# Altium PCB AMPURR.PcbDoc (part 5 of 6)
Units mm, origin at the board's own origin, x right, y up, seen from the top; angles counter-clockwise.
Board outline 100 x 100 mm, 4 copper layers (Top Layer, GND, VDD, Bottom Layer), stack 1.586 mm thick; 522 components, 281 nets, 1527 pads, 2431 vias.
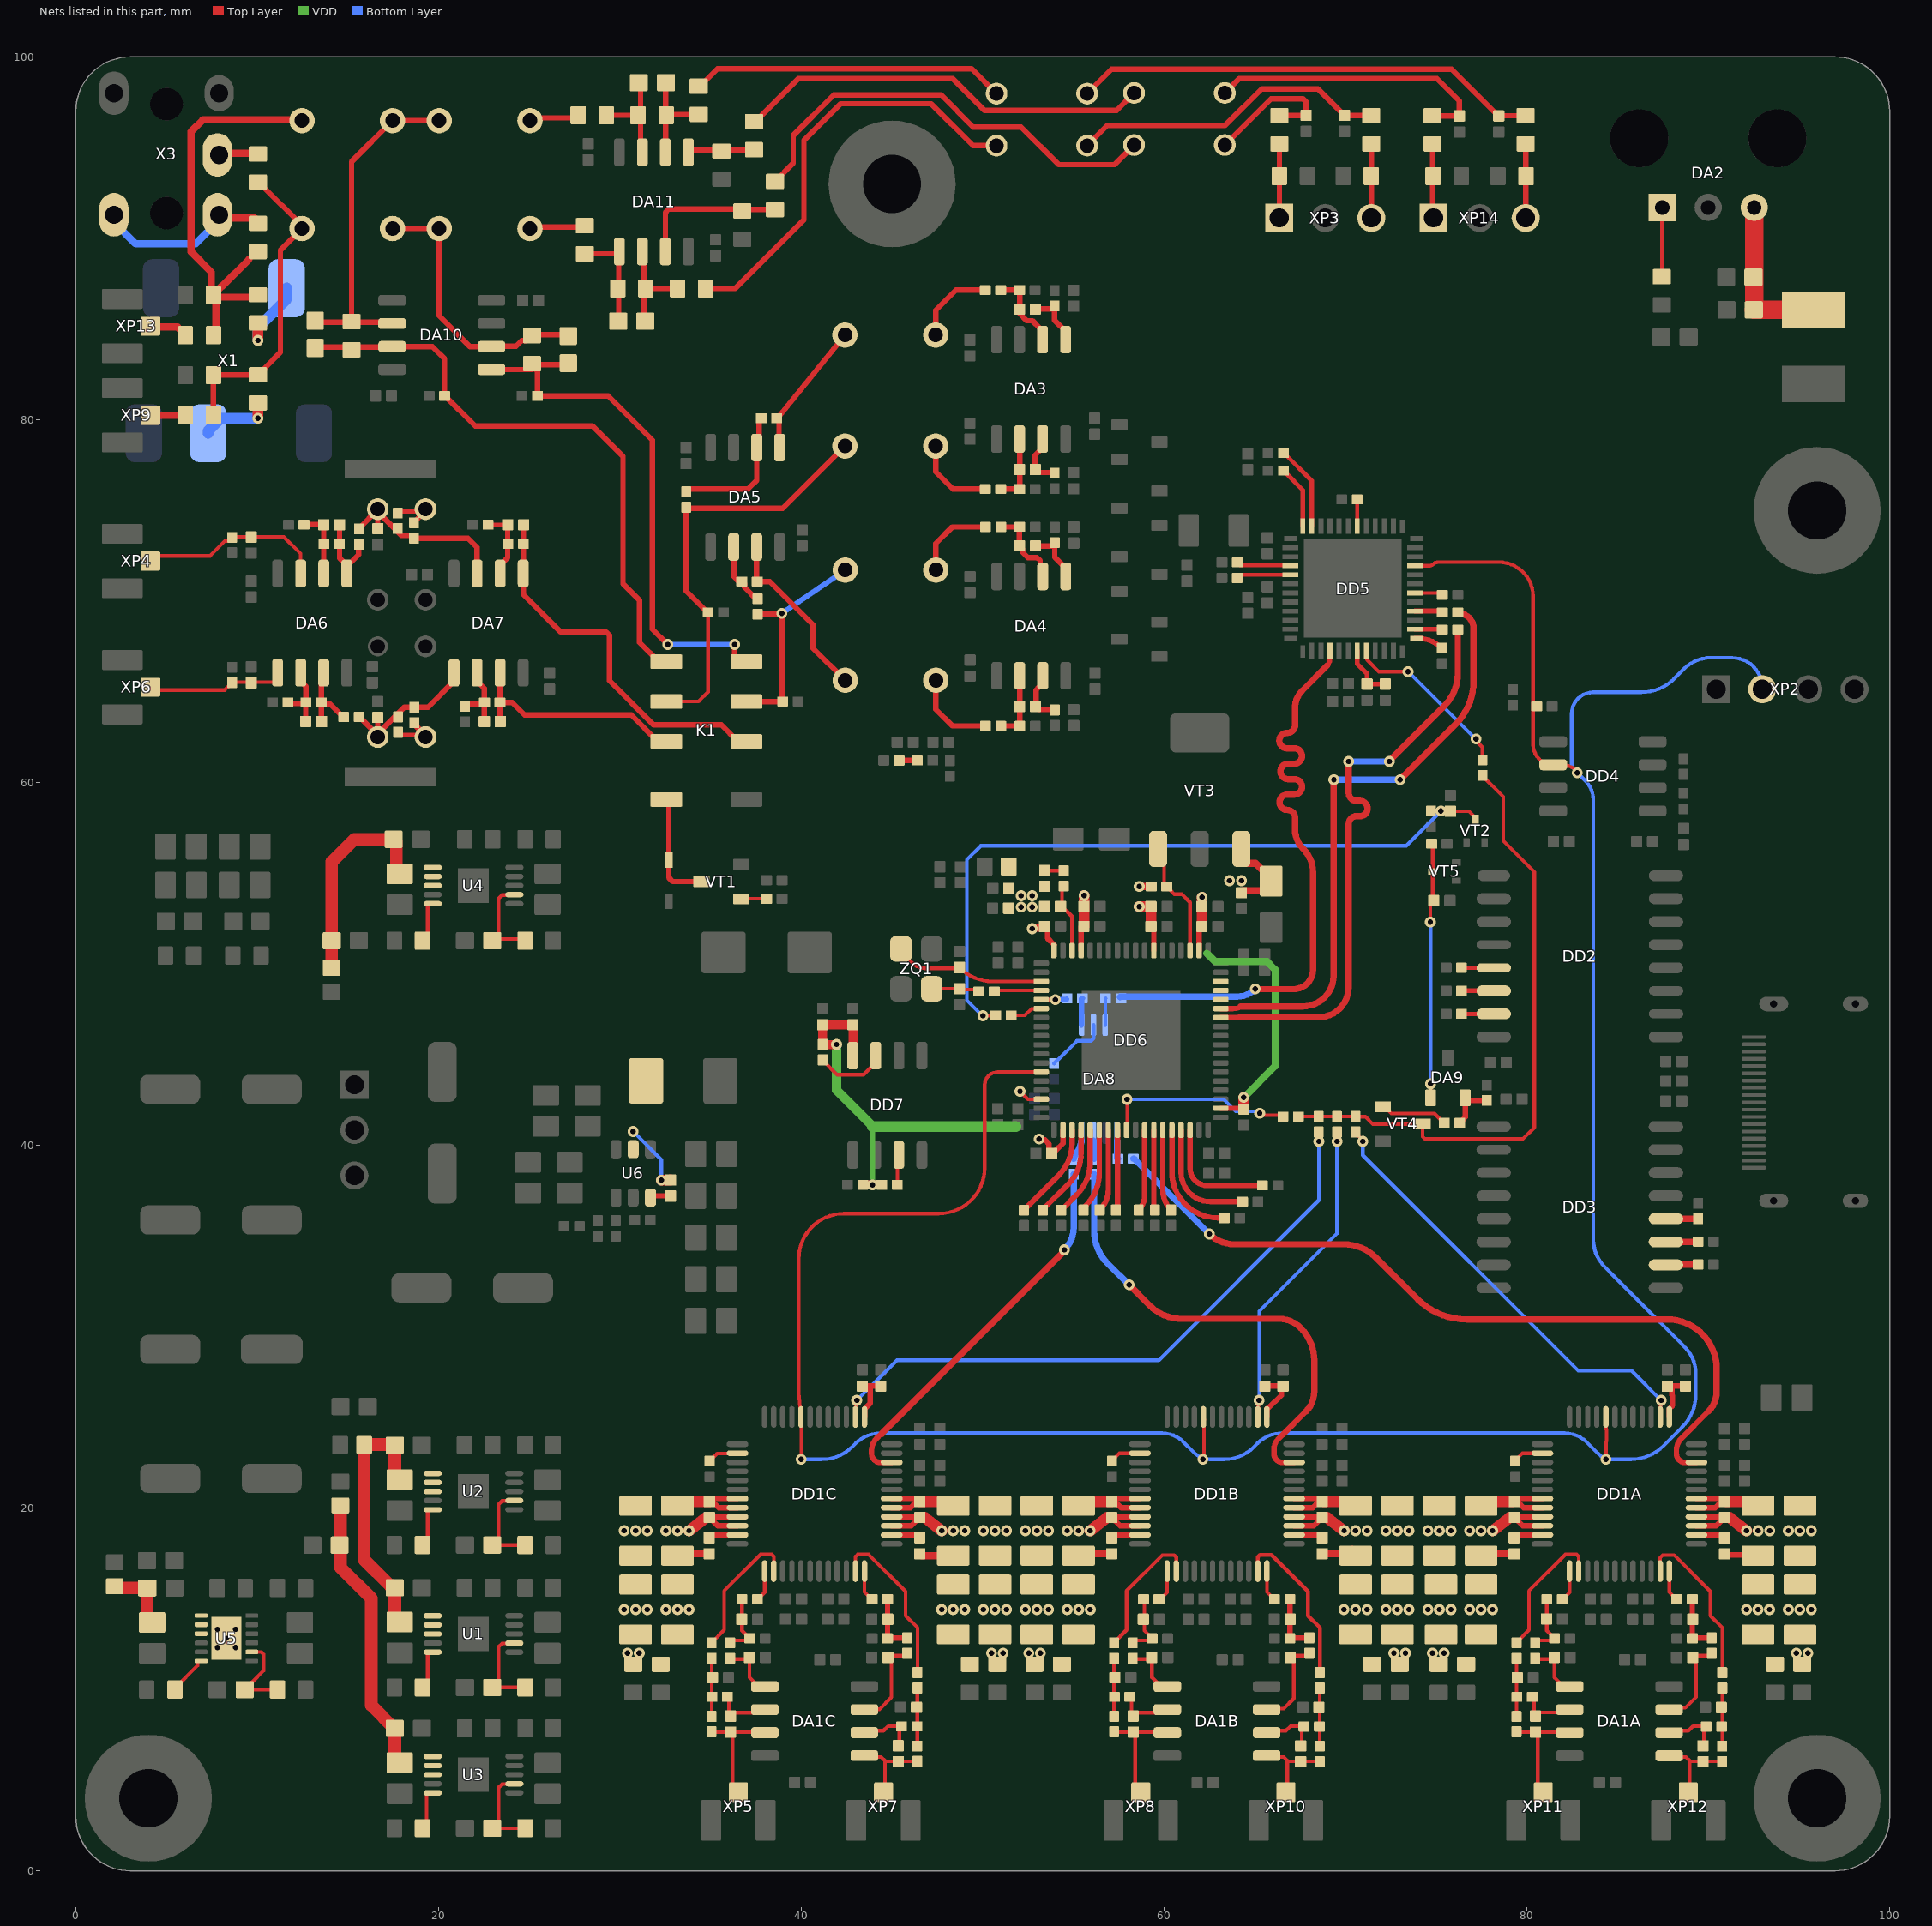
[diagram p6: the nets of this part, all layers, seen from the top]

## Via types
v1: diameter 0.6, hole 0.3, Top Layer to Bottom Layer, tented both sides, 2431 vias

## Nets (pads, with @x,y where several pads share a name; then routed paths per layer and width w, separated by ;. In a path a pad name is that pad's centre, name@x,y a point inside that pad or via, vN(x,y) a via of type N, cw(c..) or ccw(c..) an arc to the next point about the centre after c; other vN are vias at no path point) (continued)
IN2_LRCLK: DD6.66 R75.1 | length 32.5
  Top Layer w0.3: DD6.66@63.129,47.034 64.163,47.034
  Top Layer w0.35: 64.175,47.051 68.501,47.051 ccw(c68.501,48.731) 70.181,48.731 70.181,56.691 70.181,57.716 cw(c70.606,57.716) 70.606,58.141 70.796,58.141 ccw(c70.796,58.566) 71.221,58.566 ccw(c70.796,58.566) 70.796,58.991 70.606,58.991 cw(c70.606,59.416) 70.181,59.416 70.181,60.972 v1@70.181,60.974 ; v1@72.415,61.186 75.449,64.22 ccw(c73.653,66.016) 76.193,66.016 R75.1@76.193,68.434
  Bottom Layer w0.35: v1(70.18,61.16) v1(72.415,61.16)
IN2_SDATA: DD6.67 R74.1 | length 33.6
  Top Layer w0.281: DD6.67@62.985,47.535 63.917,47.535 ccw(c63.917,47.995) 64.224,47.652
  Top Layer w0.3: DD6.67@63.129,47.534 63.77,47.534
  Top Layer w0.35: 64.224,47.652 65.875,47.652 66.507,47.654 67.172,47.654 ; 67.172,47.651 67.641,47.651 ccw(c67.641,49.358) 69.348,49.358 69.348,60.143 v1(69.359,60.154) ; v1(73.015,60.152) 76.083,63.22 ccw(c73.727,65.576) 77.06,65.576 77.06,68.506 ccw(c76.24,68.506) R74.1@76.24,69.325
  Bottom Layer w0.35: v1(69.359,60.154) v1(69.359,60.154) 73.014,60.153 v1(73.015,60.152)
IN3_BCLK: DD6.68
IN3_LRCLK: DD6.69
IN3_SDATA: DD6.70
LEFT: C182.1 R145.2 R146.1 R150.2 R151.2 | length 17.3
  Top Layer w0.3: R145.2@7.586,80.264 R146.1@7.586,82.465 7.591,82.47 10.029,82.47 R151.2@10.034,82.474 10.109,82.474 10.384,82.749 10.384,82.824 11.279,83.72 11.279,89.357 C182.1@12.464,90.542 12.464,90.719 10.209,92.974 R150.2@10.034,92.974
LEFT_C: R139.2 R140.2 XP3.3 | length 4.1
  Top Layer w0.3: R140.2@71.424,95.209 71.426,95.207 71.426,91.129 XP3.3@71.427,91.128
LEFT_H: R136.2 R138.1 XP3.1 | length 4.1
  Top Layer w0.3: XP3.1@66.347,91.128 66.358,91.139 R136.2@66.358,95.209
LEFT_P: C158.2 DA6.3 R123.2 XP4.1 | length 10.5
  Top Layer w0.2: XP4.1@4.111,72.206 4.111,72.498 7.409,72.498 8.235,73.325 8.443,73.325 8.618,73.5 R123.2@8.618,73.517 ; R123.2@8.618,73.532 C158.2@9.668,73.532 11.469,73.532 12.383,72.618 12.383,71.539 DA6.3@12.397,71.526
MCLK: DA8.1 R104.1 | length 1.5
  Bottom Layer w0.3: DA8.1@55.456,46.632 55.456,48.064 R104.1@55.491,48.099
MVCC: C121.1 C124.1 C125.1 C126.2 C127.1 C130.1 C131.1 C132.1 C133.2 C134.1 C135.1 C136.1 C137.2 C148.1 C149.2 C150.2 C151.2 DD6.2 DD6.7 DD6.15 DD6.18 DD6.34 DD6.38 DD6.56 DD7.8 FB4.2 R84.1 R108.1 R109.2 R110.2 VT3.3 | length 56
  Top Layer w0.2: v1(52.053,42.974) 52.493,42.534 DD6.34@53.229,42.534
  Top Layer w0.3: v1(53.11,40.346) 53.168,40.288 53.434,40.288 53.65,40.073 53.65,39.716 C135.1@53.714,39.716 ; C134.1@53.57,51.905 53.57,51.418 DD6.18@53.929,51.06 ; C135.1@53.87,39.616 53.97,39.716 54.03,39.716 54.429,40.115 DD6.38@54.429,40.834 ; DD6.15@55.429,50.734 55.429,52.06 C133.2@55.484,52.115 ; v1@58.632,53.099 v1@58.637,53.104 ; C131.1@59.277,52.06 59.277,52.008 59.429,51.856 DD6.7@59.429,50.734 ; DD6.2@61.929,50.734 C124.1@61.929,52.009 ; DD6.56@63.129,42.034 C121.1@64.359,42.034
  Top Layer w0.4: v1(52.732,51.939) 52.77,51.977 53.322,51.977 C134.1@53.41,52.065 ; v1(58.632,54.262) 59.292,54.262 R84.1@59.292,54.265 ; VT3.3@64.252,55.539 65.054,55.539 65.906,54.687 65.906,54.446 65.481,54.021 64.355,54.021 C126.2@64.261,53.927
  Top Layer w0.5: v1@41.94,45.549 41.184,45.549 R109.2@41.176,45.557 C151.2@41.176,46.642 41.178,46.64 42.841,46.64 C150.2@42.843,46.638 42.843,45.353 42.833,45.343 DD7.8@42.833,44.943 ; R108.1@43.389,37.822 R110.2@44.439,37.822
  Top Layer w0.6: C133.2@55.585,52.065 C132.1@55.585,53.165 ; C132.1@55.593,53.173 v1(55.593,53.773) ; v1(58.632,53.162) 59.277,53.162 C131.1@59.277,52.06 ; C124.1@62.086,52.06 62.09,52.06 v1(62.09,53.682) ; v1(64.392,42.629) 64.392,42.072 C121.1@64.398,42.072
  VDD w0.3: v1(43.923,37.817) 43.923,41.054
  VDD w0.4: 62.35,50.582 62.804,50.128 65.675,50.128 66.129,49.674 66.129,44.367 v1(64.392,42.629)
  VDD w0.5: v1(41.94,45.557) 41.94,43.037 43.923,41.054
  VDD w0.6: 43.923,41.022 51.825,41.022
  other v1: 52.111,53.139 52.732,53.139 52.111,53.76 52.732,53.76 63.612,54.587 64.261,54.587
NetC3A_1: C3A.1 C4A.2 C5A.2 C6A.2 C7A.2 DD1A.41 DD1A.42 R1A.1 | length 6.4
  Top Layer w0.3: DD1A.41@89.356,20.019 90.388,20.019 C3A.1@90.725,20.356 ; DD1A.42@89.356,20.519 C3A.1@90.743,20.519 ; C3A.1@90.906,20.356 92.514,20.356 cw(c92.514,20.12) C4A.2@92.75,20.12
  Top Layer w0.62: C3A.1@90.988,20.36 C4A.2@92.51,20.36
  other v1: 94.857,11.993 95.497,11.993 94.416,14.4 95.051,14.4 95.686,14.4 94.416,18.745 95.051,18.745 95.686,18.745
NetC3A_2: C3A.2 C4A.1 C5A.1 C6A.1 C7A.1 C8A.1 DD1A.39 DD1A.40 R2A.1 | length 6.5
  Top Layer w0.3: DD1A.39@89.356,19.019 90.445,19.019 90.906,19.48 90.868,19.519 DD1A.40@89.356,19.519 ; C8A.1@90.906,17.476 91.066,17.413 92,17.413 C4A.1@92.75,17.37
  Top Layer w0.4: C3A.2@90.906,19.48 90.909,19.478 C3A.2@91.016,19.474
  Top Layer w0.62: C3A.2@91.175,19.473 v1@92.115,18.745
  other v1: 92.11,14.4 92.745,14.4 93.38,14.4 92.114,18.745 92.749,18.745 93.384,18.745
NetC3B_1: C3B.1 C4B.2 C5B.2 C6B.2 C7B.2 DD1B.41 DD1B.42 R1B.1 | length 6.8
  Top Layer w0.3: DD1B.41@67.168,20.019 68.2,20.019 C3B.1@68.537,20.356 ; DD1B.42@67.168,20.519 C3B.1@68.555,20.519
  Top Layer w0.5: C3B.1@68.718,20.356 C4B.2@70.326,20.356 ; C4B.2@70.326,20.356 cw(c70.326,20.12) C4B.2@70.562,20.12 ccw(c70.326,20.12) C4B.2@70.326,20.356
  Top Layer w0.62: C3B.1@68.8,20.36 69.609,20.36 C4B.2@70.322,20.36
  other v1: 72.669,11.993 73.309,11.993 72.228,14.4 72.863,14.4 73.498,14.4 72.228,18.745 72.863,18.745 73.498,18.745
NetC3B_2: C3B.2 C4B.1 C5B.1 C6B.1 C7B.1 C8B.1 DD1B.39 DD1B.40 R2B.1 | length 6.3
  Top Layer w0.3: DD1B.39@67.168,19.019 68.257,19.019 68.718,19.48 68.68,19.519 DD1B.40@67.168,19.519
  Top Layer w0.4: C8B.1@68.718,17.48 70.118,17.48 C4B.1@70.356,17.718 ; C3B.2@68.718,19.48 C3B.2@68.741,19.457 ; v1@69.926,18.8 v1@69.926,18.838
  Top Layer w0.62: C3B.2@68.987,19.473 v1(69.926,18.745)
  other v1: 69.922,14.4 70.557,14.4 71.192,14.4 70.561,18.745 71.196,18.745
NetC3C_1: C3C.1 C4C.2 C5C.2 C6C.2 C7C.2 DD1C.41 DD1C.42 R1C.1 | length 6.1
  Top Layer w0.3: DD1C.41@44.98,20.019 46.009,20.019 46.309,20.318 C3C.1@46.309,20.479 ; DD1C.42@44.98,20.519 C3C.1@46.309,20.519
  Top Layer w0.62: C3C.1@46.53,20.36 47.425,20.36 ; C3C.1@46.616,20.36 47.425,20.36 ; 47.425,20.36 C4C.2@48.138,20.36 ; C4C.2@48.138,20.36 cw(c48.138,20.12) C4C.2@48.378,20.12 ccw(c48.138,20.12) C4C.2@48.138,20.36
  other v1: 50.481,11.993 51.121,11.993 50.04,14.4 50.675,14.4 51.31,14.4 50.04,18.745 50.675,18.745 51.31,18.745
NetC3C_2: C3C.2 C4C.1 C5C.1 C6C.1 C7C.1 C8C.1 DD1C.39 DD1C.40 R2C.1 | length 8.1
  Top Layer w0.3: DD1C.39@44.98,19.019 46.069,19.019 C3C.2@46.53,19.48 46.492,19.519 DD1C.40@44.98,19.519
  Top Layer w0.4: C8C.1@46.53,17.48 46.635,17.375 C4C.1@48.378,17.375 ; C3C.2@46.53,19.48 46.634,19.376 47.087,19.376 v1@47.642,18.821 ; C4C.1@47.93,17.48 C4C.1@48.142,17.692
  Top Layer w0.62: C3C.2@46.803,19.473 v1@47.743,18.745
  other v1: 47.734,14.4 48.369,14.4 49.004,14.4 47.738,18.745 48.373,18.745 49.008,18.745
NetC8A_2: C8A.2 DD1A.38 | length 1.6
  Top Layer w0.3: DD1A.38@89.356,18.519 90.748,18.519 C8A.2@90.906,18.36
NetC8B_2: C8B.2 DD1B.38 | length 1.6
  Top Layer w0.3: DD1B.38@67.168,18.519 68.56,18.519 C8B.2@68.718,18.36
NetC8C_2: C8C.2 DD1C.38 | length 1.6
  Top Layer w0.3: DD1C.38@44.98,18.519 46.372,18.519 C8C.2@46.53,18.36
NetC11A_1: C11A.1 R3A.2 R4A.1 R5A.2 | length 3.2
  Top Layer w0.3: R5A.2@89.126,12.814 89.127,13.864 R3A.2@89.126,14.969 ; R5A.2@89.126,12.814 89.139,12.827 90.19,12.827 R4A.1@90.202,12.839
NetC11B_1: C11B.1 R3B.2 R4B.1 R5B.2 | length 3.2
  Top Layer w0.3: R5B.2@66.939,12.815 66.939,13.864 R3B.2@66.939,14.969 ; R5B.2@66.939,12.814 66.951,12.827 68.001,12.827 R4B.1@68.014,12.839
NetC11C_1: C11C.1 R3C.2 R4C.1 R5C.2 | length 3.2
  Top Layer w0.3: R3C.2@44.75,14.969 44.751,13.864 R5C.2@44.75,12.814 44.763,12.827 45.813,12.827 R4C.1@45.826,12.839
NetC12A_2: C12A.2 DA1A.3 R4A.2 | length 5.2
  Top Layer w0.2: DA1A.3@87.845,8.878 87.947,8.98 88.739,8.98 89.34,9.581 89.34,11.566 C12A.2@89.141,11.764 89.235,11.857 90.07,11.857 R4A.2@90.202,11.989
NetC12B_2: C12B.2 DA1B.3 R4B.2 | length 5.3
  Top Layer w0.2: DA1B.3@65.657,8.882 65.714,8.939 66.596,8.939 67.152,9.494 67.152,11.566 66.954,11.764 67.046,11.857 67.881,11.857 R4B.2@68.013,11.989
NetC12C_2: C12C.2 DA1C.3 R4C.2 | length 5.2
  Top Layer w0.2: DA1C.3@43.47,8.882 43.484,8.896 44.303,8.896 44.97,9.564 44.97,11.56 C12C.2@44.765,11.764 44.858,11.857 45.693,11.857 R4C.2@45.826,11.989
NetC13A_1: C13A.1 C14A.1 DD1A.1 | length 2.7
  Top Layer w0.3: C14A.1@87.745,26.721 88.006,26.721 C13A.1@88.746,26.721 ; DD1A.1@87.856,25.019 87.856,25.469 88.036,25.649 88.036,26.197 88.006,26.227 C14A.1@88.006,26.593
NetC13B_1: C13B.1 C14B.1 DD1B.1 | length 3.1
  Top Layer w0.3: C14B.1@65.557,26.721 C13B.1@66.558,26.721 66.46,26.623 66.46,26.213 65.715,25.469 65.668,25.469 DD1B.1@65.668,25.019
NetC13C_1: C13C.1 C14C.1 DD1C.1 | length 2.8
  Top Layer w0.3: C14C.1@43.369,26.721 C13C.1@44.37,26.721 ; DD1C.1@43.48,25.019 43.48,25.469 43.499,25.469 43.801,25.772 43.801,26.583 43.71,26.674
NetC15A_1: C15A.1 DA1A.2 R7A.1 | length 3.3
  Top Layer w0.2: DA1A.2@87.846,7.612 87.953,7.719 88.905,7.719 89.159,7.973 89.876,7.973 89.898,7.95 89.775,7.827 89.775,6.947 C15A.1@89.718,6.89
NetC15A_2: C15A.2 DA1A.1 R9A.2 XP12.1 | length 4.8
  Top Layer w0.2: DA1A.1@87.846,6.342 87.923,6.265 88.778,6.265 88.98,6.063 ; XP12.1@88.907,4.322 88.98,4.396 88.98,6.063 ; R9A.2@90.768,6.025 89.018,6.025 88.98,6.063
NetC15B_1: C15B.1 DA1B.2 R7B.1 | length 3.3
  Top Layer w0.2: DA1B.2@65.657,7.612 65.764,7.719 66.717,7.719 66.97,7.973 67.688,7.973 67.71,7.95 67.586,7.827 67.586,6.947 C15B.1@67.53,6.89
NetC15B_2: C15B.2 DA1B.1 R9B.2 XP10.1 | length 4.8
  Top Layer w0.2: DA1B.1@65.657,6.342 65.735,6.265 66.59,6.265 66.792,6.063 ; XP10.1@66.719,4.322 66.792,4.396 66.792,6.063 ; R9B.2@68.58,6.025 66.829,6.025 66.792,6.063
NetC15C_1: C15C.1 DA1C.2 R7C.1 | length 3.3
  Top Layer w0.2: DA1C.2@43.47,7.612 43.576,7.719 44.529,7.719 44.782,7.973 45.5,7.973 R7C.1@45.522,7.95 45.398,7.827 45.398,6.947 C15C.1@45.342,6.89
NetC15C_2: C15C.2 DA1C.1 R9C.2 XP7.1 | length 4.8
  Top Layer w0.2: DA1C.1@43.47,6.342 43.547,6.265 44.402,6.265 44.604,6.063 ; XP7.1@44.531,4.322 44.604,4.396 44.604,6.063 ; R9C.2@46.392,6.025 44.641,6.025 44.604,6.063
NetC16A_2: C16A.2 R6A.2 R7A.2 R9A.1 | length 3.2
  Top Layer w0.2: R9A.1@90.768,6.875 90.773,6.881 90.773,10.07 R6A.2@90.779,10.075
NetC16B_2: C16B.2 R6B.2 R7B.2 R9B.1 | length 3.2
  Top Layer w0.2: R9B.1@68.58,6.875 68.585,6.881 68.585,10.07 R6B.2@68.59,10.075
NetC16C_2: C16C.2 R6C.2 R7C.2 R9C.1 | length 3.2
  Top Layer w0.2: R9C.1@46.392,6.875 46.397,6.881 46.397,10.07 R6C.2@46.402,10.075
NetC21A_1: C21A.1 DA1A.6 R12A.2 | length 3.2
  Top Layer w0.2: R12A.2@80.3,9.585 80.389,9.497 80.389,8.617 C21A.1@80.48,8.525 ; C21A.1@80.48,8.525 80.683,8.728 82.215,8.728 DA1A.6@82.365,8.878
NetC21A_2: C21A.2 DA1A.7 R10A.2 XP11.1 | length 6.5
  Top Layer w0.2: R10A.2@79.43,7.66 79.455,7.636 80.481,7.636 80.597,7.636 82.342,7.636 DA1A.7@82.366,7.612 ; C21A.2@80.48,7.645 80.597,7.529 80.597,4.628 XP11.1@80.903,4.322
NetC21B_1: C21B.1 DA1B.6 R12B.2 | length 3.3
  Top Layer w0.2: R12B.2@58.112,9.585 58.201,9.497 58.201,8.617 C21B.1@58.292,8.525 58.48,8.713 60.308,8.713 DA1B.6@60.33,8.691
NetC21B_2: C21B.2 DA1B.7 R10B.2 XP8.1 | length 6.5
  Top Layer w0.2: R10B.2@57.242,7.66 57.267,7.636 58.293,7.636 58.409,7.636 60.154,7.636 DA1B.7@60.177,7.612 ; C21B.2@58.292,7.645 58.409,7.529 58.409,4.628 XP8.1@58.715,4.322
NetC21C_1: C21C.1 DA1C.6 R12C.2 | length 3.2
  Top Layer w0.2: R12C.2@35.925,9.585 36.013,9.497 36.013,8.617 C21C.1@36.105,8.525 36.292,8.712 37.443,8.712 37.613,8.882 DA1C.6@37.99,8.882
NetC21C_2: C21C.2 DA1C.7 R10C.2 XP5.1 | length 6.5
  Top Layer w0.2: R10C.2@35.055,7.66 35.078,7.636 36.105,7.636 36.221,7.636 37.966,7.636 DA1C.7@37.99,7.612 ; C21C.2@36.105,7.645 36.221,7.529 36.221,4.628 XP5.1@36.527,4.322
NetC22A_2: C22A.2 R10A.1 R11A.2 R12A.1 | length 3.2
  Top Layer w0.2: R10A.1@79.43,8.51 R11A.2@79.43,11.71
NetC22B_2: C22B.2 R10B.1 R11B.2 R12B.1 | length 3.2
  Top Layer w0.2: R10B.1@57.242,8.51 R11B.2@57.242,11.71
NetC22C_2: C22C.2 R10C.1 R11C.2 R12C.1 | length 3.2
  Top Layer w0.2: R10C.1@35.055,8.51 R11C.2@35.055,11.71
NetC23A_1: C23A.1 DD1A.23 | length 1.6
  Top Layer w0.3: C23A.1@79.302,18.36 79.461,18.519 DD1A.23@80.856,18.519
NetC23A_2: C23A.2 C26A.2 C27A.2 C28A.2 C29A.2 C30A.2 DD1A.21 DD1A.22 R18A.1 | length 7.6
  Top Layer w0.3: DD1A.22@80.856,19.019 79.767,19.019 79.306,19.48 79.345,19.519 DD1A.21@80.856,19.519
  Top Layer w0.4: C23A.2@79.302,17.476 79.192,17.479 78.173,17.479 77.729,17.48 C23A.2@79.302,17.48
  Top Layer w0.62: v1(78.108,18.745) C30A.2@79.048,19.473
  other v1: 76.838,14.4 77.473,14.4 78.108,14.4 76.838,18.745 77.473,18.745
NetC23B_1: C23B.1 DD1B.23 | length 1.6
  Top Layer w0.3: C23B.1@57.114,18.36 57.273,18.519 DD1B.23@58.668,18.519
NetC23B_2: C23B.2 C26B.2 C27B.2 C28B.2 C29B.2 C30B.2 DD1B.21 DD1B.22 R18B.1 | length 7.6
  Top Layer w0.3: DD1B.22@58.668,19.019 57.579,19.019 57.118,19.48 57.157,19.519 DD1B.21@58.668,19.519
  Top Layer w0.4: C28B.2@55.541,17.48 57.114,17.48 C28B.2@55.541,17.48
  Top Layer w0.62: v1@55.92,18.745 C30B.2@56.86,19.473
  other v1: 54.66,14.4 55.295,14.4 55.93,14.4 54.656,18.745 55.291,18.745 55.926,18.745
NetC23C_1: C23C.1 DD1C.23 | length 1.6
  Top Layer w0.3: C23C.1@34.926,18.36 35.085,18.519 DD1C.23@36.48,18.519
NetC23C_2: C23C.2 C26C.2 C27C.2 C28C.2 C29C.2 C30C.2 DD1C.21 DD1C.22 R18C.1 | length 5.9
  Top Layer w0.3: DD1C.22@36.48,19.019 35.391,19.019 C30C.2@34.93,19.48 34.969,19.519 DD1C.21@36.48,19.519
  Top Layer w0.4: C28C.2@33.518,17.48 C23C.2@34.926,17.48
  Top Layer w0.62: v1(33.803,18.745) C30C.2@34.743,19.473
  other v1: 32.533,14.4 33.168,14.4 33.803,14.4 32.533,18.745 33.168,18.745
NetC24A_1: C24A.1 R13A.2 R14A.1 R15A.2 | length 3.5
  Top Layer w0.2: R14A.1@80.452,12.56 80.452,12.576 80.577,12.701 81.378,12.701 81.512,12.835 81.101,13.246 81.101,13.885 R13A.2@81.101,14.969
NetC24B_1: C24B.1 R13B.2 R14B.1 R15B.2 | length 3.5
  Top Layer w0.2: R14B.1@58.264,12.56 58.264,12.576 58.389,12.701 59.19,12.701 59.324,12.835 58.913,13.246 58.913,13.885 R13B.2@58.913,14.969
NetC24C_1: C24C.1 R13C.2 R14C.1 R15C.2 | length 3.5
  Top Layer w0.2: R14C.1@36.076,12.56 36.076,12.576 36.201,12.701 37.002,12.701 37.136,12.835 36.725,13.246 36.725,13.885 R13C.2@36.725,14.969
NetC25A_2: C25A.2 DA1A.5 R14A.2 | length 3.1
  Top Layer w0.2: R14A.2@80.452,11.71 80.496,11.666 81.468,11.666 81.512,11.622 81.512,10.656 82.016,10.152 DA1A.5@82.366,10.152
NetC25B_2: C25B.2 DA1B.5 R14B.2 | length 3.1
  Top Layer w0.2: R14B.2@58.264,11.71 58.308,11.666 59.28,11.666 59.324,11.622 59.324,10.656 59.828,10.152 DA1B.5@60.177,10.152
NetC25C_2: C25C.2 DA1C.5 R14C.2 | length 3.1
  Top Layer w0.2: R14C.2@36.076,11.71 36.12,11.666 37.092,11.666 37.136,11.622 37.136,10.656 37.64,10.152 DA1C.5@37.99,10.152
NetC26A_1: C26A.1 C27A.1 C28A.1 C29A.1 C30A.1 DD1A.19 DD1A.20 R17A.1 | length 7.6
  Top Layer w0.3: C30A.1@79.469,20.519 DD1A.19@80.856,20.519 ; C30A.1@79.487,20.356 79.824,20.019 DD1A.20@80.856,20.019
  Top Layer w0.4: C28A.1@77.66,20.465 79.201,20.465 C30A.1@79.306,20.36
  Top Layer w0.62: C28A.1@77.473,20.12 cw(c77.713,20.12) C28A.1@77.713,20.36 ; C30A.1@79.235,20.36 78.83,20.36 ; C28A.1@77.713,20.36 78.83,20.36 ; C28A.1@77.713,20.36 78.426,20.36 78.83,20.36
  other v1: 74.796,11.993 75.436,11.993 74.545,14.4 75.18,14.4 75.815,14.4 74.545,18.745 75.18,18.745 75.815,18.745
NetC26B_1: C26B.1 C27B.1 C28B.1 C29B.1 C30B.1 DD1B.19 DD1B.20 R17B.1 | length 5.1
  Top Layer w0.3: C30B.1@57.118,20.356 57.281,20.519 DD1B.19@58.668,20.519 ; C30B.1@57.299,20.356 57.636,20.019 DD1B.20@58.668,20.019
  Top Layer w0.62: C28B.1@55.285,20.12 cw(c55.521,20.12) C28B.1@55.521,20.356 ; C28B.1@55.525,20.36 56.238,20.36 ; 56.238,20.356 C30B.1@57.118,20.356
  other v1: 52.543,11.993 53.183,11.993 52.354,14.4 52.989,14.4 53.624,14.4 52.354,18.745 52.989,18.745 53.624,18.745
NetC26C_1: C26C.1 C27C.1 C28C.1 C29C.1 C30C.1 DD1C.19 DD1C.20 R17C.1 | length 5.8
  Top Layer w0.3: C30C.1@35.089,20.519 DD1C.19@36.48,20.519 ; C30C.1@35.151,20.318 35.45,20.019 DD1C.20@36.48,20.019
  Top Layer w0.62: C30C.1@34.93,20.36 34.121,20.36 ; C28C.1@33.408,20.36 ccw(c33.408,20.12) C28C.1@33.168,20.12 C28C.1@33.408,20.36 ; C28C.1@33.408,20.36 34.121,20.36 ; C28C.1@33.408,20.36 34.121,20.36
  other v1: 30.42,11.993 31.06,11.993 30.226,14.4 30.861,14.4 31.496,14.4 30.226,18.745 30.861,18.745 31.496,18.745
NetC33_1: C33.1 C34.1 DA2.3 L1.1 | length 9
  Top Layer w1: C34.1@92.514,86.062 C34.1@92.54,86.062 ; DA2.3@92.54,91.706 C34.1@92.54,86.062 ; L1.1@95.812,86.028 95.777,86.062 C34.1@92.54,86.062
NetC37_1: C37.1 R25.1 R107.2 VT2.3 | length 39.7
  Top Layer w0.2: v1(50.005,47.142) 50.707,47.142 R107.2@50.723,47.158 ; R25.1@74.724,58.425 v1@75.276,58.425 ; v1(75.267,58.429) 75.275,58.421 75.792,58.421 C37.1@75.793,58.42 ; C37.1@75.788,58.412 76.812,58.412 77.17,58.054 VT2.3@77.17,57.979
  Bottom Layer w0.2: v1(50.005,47.142) 49.973,47.142 49.126,47.989 49.126,55.743 49.898,56.515 73.354,56.515 v1(75.267,58.429)
NetC42_2: C42.2 DA9.1 R129.1 VT5.3 | length 14.2
  Top Layer w0.2: v1(74.682,52.304) 74.682,53.295 C42.2@74.873,53.486 ; v1(74.697,43.385) DA9.1@74.697,42.612 DA9.1@74.761,42.547 ; R129.1@74.753,56.625 74.813,56.564 74.813,55.088 74.813,53.547 C42.2@74.846,53.514
  Bottom Layer w0.2: v1(74.682,52.304) 74.69,52.296 74.69,43.392 v1(74.697,43.385)
NetC45_2: C45.2 C46.1 C48.2 C50.1 FB1.2 U1.1 U1.2 U1.3 U2.1 U2.2 U2.3 | length 14.8
  Top Layer w0.3: C46.1@17.809,13.702 C46.1@18.159,13.352 ; C46.1@18.161,13.546 C46.1@18.161,13.565 ; C46.1@18.311,13.85 C46.1@18.313,13.852
  Top Layer w0.7: FB1.2@15.899,23.477 15.899,18.18 15.899,17.141 17.313,15.727 17.459,15.727 C48.2@17.584,15.602 17.584,13.927 C46.1@17.809,13.702 ; FB1.2@15.959,23.497 C45.2@17.545,23.497 ; C45.2@17.589,23.458 17.589,21.783 17.814,21.558 C50.1@17.86,21.558
NetC51_1: C51.1 R37.2 U1.7 | length 5.1
  Top Layer w0.2: C51.1@22.955,10.102 R37.2@24.763,10.102 ; C51.1@23.014,10.102 23.296,10.384 23.296,12.335 23.494,12.533 24.155,12.533 U1.7@24.174,12.552
NetC52_1: C52.1 R39.2 U2.7 | length 5.1
  Top Layer w0.2: C52.1@22.955,17.958 R39.2@24.763,17.958 ; C52.1@23.014,17.958 23.296,18.24 23.296,20.191 23.494,20.389 24.155,20.389 U2.7@24.174,20.408
NetC53_2: C53.2 C54.1 C193.2 FB5.2 U4.1 U4.2 U4.3 | length 11.8
  Top Layer w0.7: FB5.2@14.105,49.781 14.105,55.621 15.351,56.867 C53.2@17.519,56.867 17.545,56.867 17.669,56.742 17.669,55.088 C54.1@17.79,54.967
NetC58_1: C58.1 C61.2 C192.2 FB2.2 U3.1 U3.2 U3.3 | length 15.6
  Top Layer w0.7: FB2.2@14.584,20.134 14.584,16.726 16.295,15.015 16.295,9.111 17.561,7.845 C61.2@17.586,7.845 17.586,6.17 17.811,5.945 C58.1@17.857,5.945
NetC62_1: C62.1 R45.2 U3.7 | length 5.1
  Top Layer w0.2: C62.1@22.957,2.345 R45.2@24.765,2.345 ; C62.1@23.016,2.345 23.298,2.627 23.298,4.578 23.496,4.776 24.157,4.776 U3.7@24.176,4.795
NetC63_1: C63.1 R47.2 U4.7 | length 5.1
  Top Layer w0.2: C63.1@22.957,51.368 R47.2@24.765,51.368 ; C63.1@23.015,51.368 23.297,51.65 23.297,53.601 23.495,53.799 24.157,53.799 U4.7@24.176,53.818
NetC64_2: C64.2 R49.1 U5.8 | length 4.8
  Top Layer w0.2: C64.2@9.308,9.987 C64.2@9.333,9.987 ; U5.8@9.712,12.052 10.221,12.052 10.339,11.935 10.339,11.017 9.708,10.387 9.708,10.362 C64.2@9.333,9.987 ; R49.1@11.116,9.987 C64.2@9.333,9.987
NetC67_1: C67.1 C68.2 FB3.2 U5.1 U5.2 U5.3 U5.13 | length 3.8
  Top Layer w0.7: FB3.2@2.146,15.59 C67.1@3.937,15.589 3.937,13.914 4.162,13.689 C68.2@4.208,13.689
  other v1: 7.802,12.314 8.802,12.314 8.301,12.814 7.802,13.314 8.802,13.314
NetC70_1: C70.1 U6.6 | length 1.1
  Top Layer w0.3: U6.6@31.68,37.224 31.692,37.212 32.778,37.212 C70.1@32.79,37.2
NetC70_2: C70.2 L2.1 U6.2 | length 3.8
  Top Layer w0.6: v1(32.285,38.078) 32.766,38.078 C70.2@32.778,38.091
  Bottom Layer w0.2: v1(30.726,40.76) 32.285,39.202 v1(32.285,38.078)
NetC82_1: C82.1 DA3.1 R62.2 | length 3.3
  Top Layer w0.3: C82.1@52.902,86.103 53.791,86.103 53.966,86.278 R62.2@53.966,86.28 53.966,85.485 54.573,84.878 DA3.1@54.573,84.418
NetC82_2: C82.2 DA3.2 R55.2 R60.1 | length 4.5
  Top Layer w0.3: R60.1@50.991,87.149 50.993,87.151 R55.2@52.035,87.151 ; R55.2@52.037,87.153 52.037,85.853 52.427,85.463 52.744,85.463 53.153,85.054 53.153,85.028 53.276,84.905 53.303,84.905 DA3.2@53.303,84.418
NetC83_1: C83.1 DA5.1 R56.1 | length 7
  Top Layer w0.3: DA5.1@38.769,78.954 38.769,79.975 38.789,80.204 C83.1@42.405,84.676
NetC83_2: C83.2 R60.2 | length 4.6
  Top Layer w0.3: C83.2@47.405,84.676 47.405,86.036 48.518,87.149 R60.2@50.141,87.149
NetC99_1: C99.1 DA3.7 R68.2 | length 3
  Top Layer w0.3: C99.1@52.902,77.253 52.902,78.05 53.303,78.451 DA3.7@53.303,78.938 ; C99.1@52.905,77.253 53.066,77.092 53.932,77.092 R68.2@53.966,77.058
NetC99_2: C99.2 DA3.6 R65.2 R66.1 | length 3.8
  Top Layer w0.3: R66.1@50.991,76.178 R65.2@52.041,76.177 52.041,78.938 DA3.6@52.033,78.938
NetC100_1: C100.1 K1.6 R58.2 R69.2 | length 23.1
  Top Layer w0.2: K1.6@32.554,64.464 34.335,64.464 34.856,64.985 R69.2@34.856,69.372
  Top Layer w0.3: R69.2@34.649,69.554 33.646,70.557 33.646,75.005 R58.2@33.646,75.177 33.705,75.118 38.971,75.118 C100.1@42.405,78.552
NetC100_2: C100.2 R66.2 | length 6
  Top Layer w0.3: C100.2@47.405,78.552 47.405,77.121 48.348,76.178 R66.2@50.141,76.178 48.725,76.178
NetC106_1: C106.1 DA4.1 R73.2 | length 3.3
  Top Layer w0.3: C106.1@52.909,73.043 53.798,73.043 53.973,73.218 R73.2@53.973,73.22 53.973,72.425 54.58,71.818 DA4.1@54.58,71.358
NetC106_2: C106.2 DA4.2 R70.2 R71.1 | length 4.6
  Top Layer w0.3: R71.1@50.998,74.089 R70.2@52.029,74.089 ; R70.2@52.037,74.089 R70.2@52.029,74.089 ; DA4.2@53.311,71.358 53.171,71.498 53.171,72.227 52.995,72.403 52.489,72.403 52.189,72.703 52.189,72.883 C106.2@52.029,73.043 R70.2@52.029,74.089
NetC107_1: C107.1 K1.3 R79.2 R81.2 | length 12.5
  Top Layer w0.3: K1.3@36.974,64.464 R81.2@38.971,64.464 38.946,64.489 38.946,69.295 v1(38.921,69.32) 38.903,69.302 37.606,69.302 R79.2@37.588,69.284
  Bottom Layer w0.3: v1(38.921,69.32) C107.1@42.419,71.716
NetC107_2: C107.2 R71.2 | length 4.6
  Top Layer w0.3: C107.2@47.419,71.716 47.419,73.187 48.322,74.089 R71.2@50.148,74.089
NetC112_1: C112.1 DA4.7 R82.2 | length 3
  Top Layer w0.3: DA4.7@53.311,65.878 53.31,65.445 53.114,65.249 53.091,65.249 52.943,65.101 52.943,64.223 52.913,64.193 53.073,64.032 53.939,64.032 R82.2@53.973,63.998
NetC112_2: C112.2 DA4.6 R78.2 R80.1 | length 3.8
  Top Layer w0.3: R80.1@50.998,63.118 R78.2@52.048,63.117 ; DA4.6@52.041,65.878 52.044,65.874 52.044,63.121 R78.2@52.048,63.117
NetC113_1: C113.1 DA5.7 R77.1 | length 9.8
  Top Layer w0.3: DA5.7@37.539,72.987 37.537,72.985 37.537,71.31 37.535,71.307 37.535,71.282 R77.1@37.71,71.107 ; R77.1@37.567,71.081 37.71,71.081 38.262,71.081 40.658,68.685 40.658,67.394 C113.1@42.419,65.633
NetC113_2: C113.2 R80.2 | length 4.7
  Top Layer w0.3: C113.2@47.419,65.633 47.419,64.03 48.331,63.118 R80.2@50.148,63.118
NetC117_1: C117.1 C119.1 DD5.19 | length 2.9
  Top Layer w0.26: DD5.19@70.648,67.265 70.648,66.555 71.191,66.011 C117.1@71.191,65.427 ; C117.1@71.321,65.427 C119.1@72.191,65.427
NetC136_2: C136.2 R97.2 | length 1.1
  Top Layer w0.2: C136.2@53.419,55.155 53.419,55.14 R97.2@54.469,55.14
NetC137_1: C137.1 DD6.16 R97.1 | length 3.8
  Top Layer w0.2: R97.1@54.376,54.29 54.376,53.165 54.929,52.612 DD6.16@54.929,50.734
NetC144_2: C144.2 DD6.21 ZQ1.1 | length 8.4
  Top Layer w0.2: ZQ1.1@45.489,50.827 ccw(c45.841,50.827) 45.592,50.578 46.139,50.031 ccw(c46.803,50.695) 46.803,49.756 48.605,49.756 ccw(c48.605,49.91) C144.2@48.714,49.801 48.737,49.778 ccw(c50.533,51.574) 50.533,49.034 DD6.21@53.229,49.034
NetC145_2: C145.2 R103.2 ZQ1.3 | length 2.7
  Top Layer w0.2: ZQ1.3@47.189,48.627 48.714,48.627 48.714,48.681 48.811,48.584 49.676,48.584 R103.2@49.79,48.47
NetC153_1: C153.1 DA6.7 R111.1 R112.2 | length 4.3
  Top Layer w0.3: C153.1@13.54,63.325 13.54,64.236 R112.2@13.54,64.361 ; DA6.7@13.667,66.046 13.54,65.919 R112.2@13.54,64.361 ; R111.1@14.768,63.614 14.643,63.739 14.607,63.739 14.012,64.335 13.566,64.335 R112.2@13.54,64.361
NetC153_2: C153.2 DA6.6 R112.1 R117.2 | length 3.4
  Top Layer w0.3: R117.2@11.685,64.361 R112.1@12.656,64.361 ; DA6.6@12.397,65.586 12.69,65.293 R112.1@12.69,64.361 ; C153.2@12.675,63.311 R112.1@12.675,64.346
NetC154_2: C154.2 C155.1 DA7.5 R111.2 R113.2 R114.2 | length 8
  Top Layer w0.3: R111.2@15.618,63.614 15.643,63.614 C154.2@16.646,62.612 ; C154.2@16.646,62.506 C154.2@16.646,62.686 ; C155.1@16.646,63.623 C154.2@16.646,62.686 ; DA7.5@20.852,65.586 19.415,64.149 R114.2@18.664,64.149 18.109,64.149 C154.2@16.646,62.686
NetC156_2: C156.2 R113.1 R114.1 | length 3.2
  Top Layer w0.2: R113.1@17.76,62.767 17.89,62.636 19.15,62.636 R114.1@18.631,63.155 ; R114.1@18.664,63.299 18.664,63.274 19.281,62.657 C156.2@19.281,62.506
NetC157_1: C157.1 DA7.7 K1.7 R116.2 | length 12.5
  Top Layer w0.3: C157.1@23.382,63.315 C157.1@23.387,63.32 ; R116.2@23.383,64.411 24.053,64.411 24.747,63.717 30.625,63.717 32.079,62.264 K1.7@32.316,62.264 ; C157.1@23.387,63.283 R116.2@23.387,64.286 ; R116.2@23.392,64.427 DA7.7@23.392,66.046
NetC157_2: C157.2 DA7.6 R116.1 R118.2 | length 4
  Top Layer w0.3: R118.2@21.459,64.197 21.58,64.318 22.45,64.318 R116.1@22.532,64.4 ; DA7.6@22.122,66.046 22.122,65.586 22.521,65.187 C157.2@22.521,63.361
NetC159_1: C159.1 DA6.1 R119.1 R122.2 | length 3.8
  Top Layer w0.3: C159.1@14.542,74.211 14.542,72.381 14.851,72.072 15.1,72.072 15.589,72.561 15.589,73.111 R119.1@15.608,73.13
NetC159_2: C159.2 DA6.2 R122.1 R126.2 | length 3.8
  Top Layer w0.3: R126.2@12.578,74.212 13.663,74.212 13.665,74.21 13.665,73.161 13.665,71.528 DA6.2@13.667,71.526
NetC160_2: C160.2 C161.1 DA7.3 R119.2 R120.2 R121.2 | length 10.5
  Top Layer w0.3: R119.2@15.608,73.98 15.608,74.005 16.646,75.042 C160.2@16.646,75.073 ; C161.1@16.646,73.995 C160.2@16.646,75.073 ; DA7.3@22.122,71.526 22.122,72.968 21.622,73.469 R120.2@18.649,73.469 18.649,73.494 18.524,73.619 17.96,73.619 16.646,74.933 C160.2@16.646,75.073
NetC162_2: C162.2 R120.1 R121.1 | length 2.6
  Top Layer w0.3: R121.1@17.745,74.851 17.856,74.962 19.17,74.962 C162.2@19.281,75.073 19.281,74.976 18.649,74.344 R120.1@18.649,74.319
NetC163_1: C163.1 DA7.1 K1.2 R124.2 | length 21
  Top Layer w0.3: DA7.1@24.662,71.526 24.662,70.359 26.721,68.3 29.238,68.3 29.414,68.124 29.414,65.607 31.846,63.176 35.587,63.176 36.499,62.264 K1.2@36.974,62.264 ; DA7.1@24.668,71.532 24.668,73.154 24.681,73.167 24.681,74.203 C163.1@24.689,74.211
NetC163_2: C163.2 DA7.2 R124.1 R125.2 | length 3.9
  Top Layer w0.2: R125.2@22.724,74.214 C163.2@23.809,74.214
  Top Layer w0.3: DA7.2@23.392,71.526 23.392,71.986 23.809,72.403 C163.2@23.809,74.214
NetC169_1: C169.1 C174.1 R136.1 | length 7.8
  Top Layer w0.3: C169.1@63.344,95.145 65.898,97.698 67.657,97.698 67.833,97.523 C174.1@67.833,96.776 67.824,96.767 66.367,96.767 R136.1@66.358,96.759
NetC169_2: C169.2 R137.1 | length 24.7
  Top Layer w0.3: R137.1@38.545,93.137 39.552,94.145 39.552,95.671 41.782,97.9 47.71,97.9 49.47,96.14 52.124,96.14 54.202,94.062 57.261,94.062 C169.2@58.344,95.145
NetC175_1: C175.1 C176.1 R140.1 | length 17.6
  Top Layer w0.3: C176.1@55.758,95.112 56.871,96.225 63.355,96.225 65.372,98.242 68.483,98.242 C175.1@69.949,96.776 71.407,96.776 R140.1@71.424,96.759
NetC176_2: C176.2 R141.2 | length 23.8
  Top Layer w0.3: R141.2@34.726,87.236 36.355,87.236 40.142,91.023 40.142,95.399 42.162,97.42 47.151,97.42 49.46,95.111 C176.2@50.758,95.111
NetC177_1: C177.1 DA10.1 K1.4 R143.2 R147.1 | length 30.2
  Top Layer w0.2: K1.4@36.319,66.844 36.499,66.664 K1.4@36.974,66.664
  Top Layer w0.3: DA10.1@22.915,82.768 R143.2@25.15,82.768 ; C177.1@27.151,83.115 27.076,83.04 25.225,83.04 25.15,82.965 25.45,82.665 R147.1@25.45,81.313 29.345,81.313 31.787,78.871 31.787,68.456 v1(32.631,67.613) ; K1.4@36.319,66.844 v1@36.319,67.555
  Bottom Layer w0.3: v1(32.631,67.613) v1(36.319,67.613)
NetC177_2: C177.2 C179.2 C182.2 DA10.2 R143.1 | length 15.7
  Top Layer w0.3: C182.2@17.464,90.542 C179.2@20.034,90.542 20.034,85.73 21.726,84.038 DA10.2@22.915,84.038 ; DA10.2@22.93,84.053 24.263,84.053 24.575,84.365 24.8,84.365 24.975,84.54 24.975,84.765 25.15,84.765 25.225,84.69 27.076,84.69 C177.2@27.151,84.615
NetC178_1: C178.1 DA11.1 R142.1 R144.2 | length 5.8
  Top Layer w0.3: R144.2@28.055,89.15 29.843,89.15 DA11.1@29.933,89.239 ; C178.1@29.901,85.436 29.933,85.467 DA11.1@29.933,89.239 ; DA11.1@29.964,89.271 DA11.1@29.933,89.239
NetC178_2: C178.2 DA11.2 R141.1 R142.2 | length 5.7
  Top Layer w0.3: DA11.2@31.234,89.271 31.318,89.188 31.318,85.519 C178.2@31.401,85.436 ; R142.2@31.426,87.236 R141.1@33.176,87.236
NetC179_1: C179.1 R144.1 | length 3.1
  Top Layer w0.3: C179.1@25.034,90.542 25.113,90.621 27.976,90.621 R144.1@28.055,90.7
NetC180_1: C180.1 DA10.7 K1.5 R149.2 R154.1 | length 33.3
  Top Layer w0.3: C180.1@13.2,83.959 13.239,83.999 17.396,83.999 DA10.7@17.435,84.038 19.654,84.038 20.33,83.361 R154.1@20.33,81.313 20.355,81.313 22.02,79.648 28.488,79.648 30.166,77.97 30.166,70.958 31.079,70.045 31.079,67.724 32.139,66.664 K1.5@32.554,66.664
NetC180_2: C180.2 C181.2 C183.2 DA10.6 R149.1 | length 18.6
  Top Layer w0.3: C180.2@13.2,85.459 13.275,85.384 17.359,85.384 DA10.6@17.435,85.308 ; R149.1@15.2,85.66 15.2,94.228 C183.2@17.464,96.492 C181.2@20.034,96.492
NetC181_1: C181.1 R156.1 | length 2.8
  Top Layer w0.3: C181.1@25.034,96.492 25.181,96.639 27.545,96.639 R156.1@27.692,96.786
NetC184_1: C184.1 C187.1 R171.1 | length 25.8
  Top Layer w0.3: C184.1@55.758,97.981 57.097,99.32 75.854,99.32 78.215,96.959 78.24,96.959 78.415,96.783 78.415,96.759 R171.1@79.933,96.759
NetC184_2: C184.2 R168.2 | length 17.4
  Top Layer w0.2: C184.2@50.758,98.025 C184.2@50.763,98.025
  Top Layer w0.3: R168.2@34.341,98.387 34.416,98.387 35.379,99.35 49.389,99.35 C184.2@50.758,97.981
NetC185_1: C185.1 DA11.7 R156.2 R164.1 | length 5.7
  Top Layer w0.3: R156.2@29.242,96.786 R164.1@30.992,96.786 ; C185.1@31.036,98.587 31.135,98.487 31.135,94.851 DA11.7@31.234,94.751
NetC185_2: C185.2 DA11.6 R164.2 R168.1 | length 5.7
  Top Layer w0.3: DA11.6@32.504,94.751 32.52,94.767 32.52,98.571 C185.2@32.536,98.587 ; R164.2@32.542,96.786 32.568,96.812 34.316,96.812 R168.1@34.341,96.837
NetC186_1: C186.1 C188.1 R174.1 | length 16.2
  Top Layer w0.3: C186.1@63.344,98.015 64.136,98.806 75.048,98.806 76.281,97.573 C188.1@76.281,96.749 74.741,96.749 R174.1@74.731,96.759
NetC186_2: C186.2 R166.1 | length 23.1
  Top Layer w0.3: R166.1@37.395,96.438 37.47,96.438 39.851,98.819 48.327,98.819 50.095,97.051 57.381,97.051 C186.2@58.344,98.015
NetDA2_1: DA2.1 R19.1 | length 3.8
  Top Layer w0.2: R19.1@87.46,87.887 DA2.1@87.46,91.706
NetDA5_2: DA5.2 R56.2 R58.1 | length 7.7
  Top Layer w0.3: R58.1@33.646,76.027 33.646,76.052 33.771,76.177 37.058,76.177 37.539,76.659 DA5.2@37.539,78.467 37.675,78.603 37.675,79.965 R56.2@37.789,80.079
NetDA5_6: DA5.6 R77.2 R79.1 | length 3.5
  Top Layer w0.3: DA5.6@36.269,72.987 36.269,71.362 R77.2@36.621,71.01 ; R77.2@36.717,71.081 36.742,71.081 36.867,70.956 36.867,70.764 R79.1@37.543,70.089
NetDA8_2: DA8.2 R99.1 | length 3.5
  Bottom Layer w0.2: R99.1@53.941,44.505 53.941,44.53 54.116,44.705 54.147,44.705 55.194,45.752 55.967,45.752 56.111,45.897 56.111,46.627 DA8.2@56.106,46.632
NetDA8_3: DA8.3 R98.2 | length 1.5
  Bottom Layer w0.2: DA8.3@56.756,46.632 56.756,48.079 R98.2@56.776,48.099
NetDA8_5: DA8.5 R101.2 | length 1
  Bottom Layer w0.35: DA8.5@57.406,40.241 57.406,39.294 R101.2@57.452,39.248
NetDA8_7: DA8.7 R102.2 | length 1
  Bottom Layer w0.35: DA8.7@56.102,40.257 56.102,39.294 R102.2@56.148,39.248
NetDA8_8: DA8.8 R100.2 | length 1.1
  Bottom Layer w0.35: R100.2@55.019,39.248 55.044,39.373 cw(c55.369,39.245) 55.098,39.466 ccw(c53.831,40.502) DA8.8@55.447,40.244
NetDA9_2: DA9.2 R127.1 R128.1 | length 2.7
  Top Layer w0.3: R127.1@76.302,41.235 76.327,41.235 76.452,41.36 76.452,41.385 76.609,41.542 DA9.2@76.609,42.549 ; DA9.2@76.596,42.549 76.675,42.47 R128.1@77.786,42.47
NetDA11_3: DA11.3 R135.2 R137.2 | length 8.3
  Top Layer w0.3: DA11.3@32.504,89.271 32.504,91.437 32.68,91.612 36.641,91.612 R135.2@36.745,91.509 ; R135.2@36.745,91.587 R137.2@38.545,91.587
NetDA11_5: DA11.5 R166.2 R169.2 | length 3.7
  Top Layer w0.3: DA11.5@33.774,94.751 33.911,94.888 R166.2@37.395,94.888
NetDD1A_2: DD1A.2 R8A.1 | length 24.4
  Top Layer w0.2: R8A.1@70.551,40.73 70.726,40.53 70.942,40.239 70.959,40.221 v1@70.959,40.192 ; DD1A.2@87.375,25.038 87.375,25.906 v1(87.406,25.936)
  Bottom Layer w0.2: v1@70.959,40.192 70.959,39.447 82.842,27.564 85.778,27.564 v1(87.406,25.936)
  other v1: 70.959,40.216
NetDD1A_14: DD1A.14 R16A.2 | length 1.7
  Top Layer w0.2: R16A.2@79.356,22.585 79.356,22.61 79.765,23.019 DD1A.14@80.856,23.019
NetDD1A_25: DD1A.25 R13A.1 | length 1.7
  Top Layer w0.2: R13A.1@81.951,14.969 81.976,14.969 82.356,15.349 DD1A.25@82.356,16.519
NetDD1A_26: DD1A.26 R11A.1 | length 7.6
  Top Layer w0.2: R11A.1@79.43,12.56 79.431,12.585 80.119,13.274 80.119,15.43 82.127,17.437 82.744,17.437 82.861,17.32 DD1A.26@82.861,16.524
NetDD1A_35: DD1A.35 R6A.1 | length 9.1
  Top Layer w0.2: DD1A.35@87.351,16.524 87.351,17.261 87.489,17.399 88.123,17.399 90.12,15.403 90.12,14.056 90.779,13.397 R6A.1@90.779,10.925
NetDD1A_36: DD1A.36 R3A.1 | length 1.7
  Top Layer w0.2: DD1A.36@87.856,16.519 87.856,15.365 88.252,14.969 R3A.1@88.277,14.969
NetDD1A_46: DD1A.46 R101.1 | length 43.9
  Top Layer w0.3: DD1A.46@89.356,22.519 88.714,22.519 cw(c88.714,22.984) 88.249,22.984 88.249,23.182 cw(c89.163,23.182) 88.517,23.828 90.018,25.329
  Top Layer w0.35: v1(62.497,35.107) ccw(c63.862,36.472) 63.862,34.541 69.895,34.541 cw(c69.895,32.001) 71.691,33.798 73.974,31.514 ccw(c76.664,34.201) 76.664,30.399 87.728,30.399 cw(c87.728,27.66) 90.468,27.66 90.468,26.416 cw(c88.931,26.416) 90.018,25.329
  Bottom Layer w0.35: R101.1@58.302,39.248 cw(c58.302,39.118) 58.394,39.21 v1(62.497,35.107)
NetDD1B_2: DD1B.2 R8B.1 | length 17.5
  Top Layer w0.2: DD1B.2@65.187,25.038 65.187,25.878 v1(65.242,25.934) ; v1@69.534,40.147 R8B.1@69.534,40.73
  Bottom Layer w0.2: v1(65.242,25.934) 65.242,30.846 69.534,35.138 v1@69.534,40.147
  other v1: 69.534,40.216
NetDD1B_14: DD1B.14 R16B.2 | length 1.7
  Top Layer w0.2: R16B.2@57.131,22.585 57.131,22.61 57.54,23.019 DD1B.14@58.668,23.019
NetDD1B_25: DD1B.25 R13B.1 | length 1.7
  Top Layer w0.2: R13B.1@59.763,14.969 59.788,14.969 60.168,15.349 DD1B.25@60.168,16.519
NetDD1B_26: DD1B.26 R11B.1 | length 7.5
  Top Layer w0.2: R11B.1@57.242,12.56 57.243,12.585 57.931,13.274 57.931,15.43 59.903,17.402 60.555,17.402 60.673,17.285 DD1B.26@60.673,16.524
NetDD1B_35: DD1B.35 R6B.1 | length 9.2
  Top Layer w0.2: DD1B.35@65.163,16.524 65.163,17.292 65.28,17.41 65.925,17.41 67.931,15.403 67.931,14.056 68.59,13.397 R6B.1@68.59,10.925
NetDD1B_36: DD1B.36 R3B.1 | length 1.7
  Top Layer w0.2: DD1B.36@65.668,16.519 65.668,15.365 66.063,14.969 R3B.1@66.088,14.969
NetDD1B_46: DD1B.46 R102.1 | length 26.4
  Top Layer w0.3: DD1B.46@67.168,22.519 66.526,22.519 cw(c66.526,22.984) 66.061,22.984 66.061,23.182 66.061,23.251 cw(c66.829,23.251) 66.286,23.794 66.511,24.019 66.522,24.019 67.827,25.325
  Top Layer w0.35: v1(58.067,32.301) 59.196,31.171 ccw(c60.992,32.967) 60.992,30.427 66.335,30.427 cw(c66.335,28.748) 67.534,29.924 cw(c65.738,28.128) 68.278,28.128 68.278,26.416 68.28,26.416 cw(c66.736,26.416) 67.827,25.325
  Bottom Layer w0.35: R102.1@56.148,38.398 56.148,35.271 ccw(c58.688,35.271) 56.892,33.475 v1(58.067,32.301)
NetDD1C_2: DD1C.2 R8C.1 | length 34.8
  Top Layer w0.2: DD1C.2@42.98,25.019 42.999,25.038 42.999,25.878 v1(43.054,25.933) ; R8C.1@68.521,40.73 68.527,40.724 68.527,40.138 v1@68.532,40.132
  Bottom Layer w0.2: v1(43.054,25.933) 45.266,28.146 59.708,28.146 68.547,36.985 68.547,40.117 v1@68.532,40.132
  other v1: 68.532,40.216
NetDD1C_14: DD1C.14 R16C.2 | length 1.7
  Top Layer w0.2: R16C.2@34.943,22.585 34.943,22.61 35.118,22.785 35.143,22.785 35.36,23.002 36.48,23.002 DD1C.14@36.48,23.019
NetDD1C_25: DD1C.25 R13C.1 | length 1.7
  Top Layer w0.2: R13C.1@37.575,14.969 37.6,14.969 37.98,15.349 DD1C.25@37.98,16.519
NetDD1C_26: DD1C.26 R11C.1 | length 7.6
  Top Layer w0.2: R11C.1@35.055,12.56 35.055,12.585 35.743,13.274 35.743,15.43 37.751,17.437 38.367,17.437 38.485,17.32 DD1C.26@38.485,16.524
NetDD1C_35: DD1C.35 R6C.1 | length 9.2
  Top Layer w0.2: DD1C.35@42.975,16.524 42.975,17.315 43.092,17.432 43.714,17.432 45.743,15.403 45.743,14.056 46.402,13.397 R6C.1@46.402,10.925
NetDD1C_36: DD1C.36 R3C.1 | length 1.7
  Top Layer w0.2: DD1C.36@43.48,16.519 43.48,15.365 43.875,14.969 R3C.1@43.9,14.969
NetDD1C_46: DD1C.46 R100.1 | length 21.9
  Top Layer w0.2: 44.338,22.519 DD1C.46@44.98,22.519
  Top Layer w0.3: 44.338,22.519 cw(c44.338,22.984) 43.873,22.984 43.873,23.182 cw(c44.786,23.182) 44.14,23.828 44.411,24.099 ; DD1C.46@44.403,22.519 DD1C.46@44.98,22.519
  Top Layer w0.35: 44.426,24.085 44.426,24.094 54.501,34.169 v1(54.501,34.231)
  Bottom Layer w0.35: v1(54.501,34.231) ccw(c53.251,35.481) 55.019,35.481 R100.1@55.019,38.398
NetDD2_13: DD2.13 R24.2 | length 1.8
  Top Layer w0.25: R24.2@76.4,49.788 78.175,49.788 DD2.13@78.175,49.782
NetDD2_14: DD2.14 R23.2 | length 1.8
  Top Layer w0.25: R23.2@76.4,48.517 78.175,48.517 DD2.14@78.175,48.512
NetDD2_15: DD2.15 R22.2 | length 1.8
  Top Layer w0.25: R22.2@76.4,47.238 78.175,47.238 DD2.15@78.175,47.242
NetDD3_10: DD3.10 R28.1 | length 3.6
  Top Layer w0.2: DD3.10@87.671,33.404 87.683,33.417 89.433,33.417 R28.1@89.446,33.43
  Top Layer w0.35: DD3.10@87.664,33.419 R28.1@89.439,33.419
NetDD3_11: DD3.11 R27.1 | length 1.8
  Top Layer w0.35: DD3.11@87.671,34.674 89.446,34.674 R27.1@89.446,34.684
NetDD3_12: DD3.12 R26.1 | length 1.8
  Top Layer w0.35: DD3.12@87.671,35.945 87.671,35.942 R26.1@89.446,35.942
NetDD5_4: DD5.4 R133.1 | length 3
  Top Layer w0.2: R133.1@64.041,72.104 64.171,71.975 66.938,71.975 DD5.4@66.963,71.95
NetDD5_5: DD5.5 R134.1 | length 3
  Top Layer w0.2: R134.1@64.041,71.263 64.066,71.263 64.254,71.451 DD5.5@66.963,71.451
NetDD5_16: DD5.16 R98.1 | length 34.3
  Top Layer w0.27: 68.992,66.463 ccw(c68.615,66.839) 69.148,66.839 DD5.16@69.148,67.266
  Top Layer w0.35: v1(65.019,48.624) 65.019,48.606 67.131,48.606 ccw(c67.131,49.691) 68.216,49.691 68.216,55.024 ccw(c66.345,55.024) 67.668,56.347 cw(c68.755,57.433) 67.263,57.064 cw(c68.755,57.433) 67.231,57.238 ; 67.231,57.239 67.218,57.433 67.218,58.06 ccw(c66.793,58.06) 66.793,58.485 cw(c66.793,58.91) 66.368,58.91 cw(c66.793,58.91) 66.793,59.335 67.176,59.335 ccw(c67.176,59.76) 67.601,59.76 ccw(c67.176,59.76) 67.176,60.185 66.839,60.185 cw(c66.839,60.61) 66.414,60.61 cw(c66.839,60.61) 66.839,61.035 67.176,61.035 ccw(c67.176,61.46) 67.601,61.46 ccw(c67.176,61.46) 67.176,61.885 66.781,61.885 cw(c66.781,62.31) 66.356,62.31 cw(c66.781,62.31) 66.781,62.735 66.793,62.735 ccw(c66.793,63.16) 67.218,63.16 67.218,64.116 cw(c68.553,64.116) 67.22,64.185 cw(c68.553,64.116) 67.22,64.186 cw(c68.553,64.116) 67.298,64.571 cw(c68.553,64.116) 67.609,65.06 69.002,66.453
  Bottom Layer w0.35: R98.1@57.572,48.166 cw(c57.645,48.093) 57.645,48.196 64.031,48.196 ccw(c64.031,49.592) v1@65.018,48.605
NetDD5_20: DD5.20 R83.1 | length 9.6
  Top Layer w0.2: DD5.20@71.183,67.231 71.183,66.77 71.845,66.107 v1(73.449,66.107) ; v1(77.198,62.395) 77.198,62.287 77.537,61.948 77.537,61.252 R83.1@77.545,61.244
  Bottom Layer w0.2: v1(73.449,66.107) 73.468,66.107 77.179,62.395 v1(77.198,62.395)
NetDD5_25: DD5.25 R76.2 | length 1.6
  Top Layer w0.281: DD5.25@73.833,67.95 74.009,67.95 cw(c74.009,66.102) R76.2@75.316,67.409
NetDD5_26: DD5.26 R75.2 | length 1.5
  Top Layer w0.281: DD5.26@73.833,68.45 75.304,68.45 cw(c75.304,68.395) R75.2@75.343,68.434
NetDD5_28: DD5.28 R74.2 | length 1.5
  Top Layer w0.281: DD5.28@73.833,69.45 75.297,69.45 cw(c75.297,69.395) R74.2@75.337,69.434
NetDD5_30: DD5.30 R72.2 | length 1.5
  Top Layer w0.2: DD5.30@73.833,70.45 75.293,70.45 R72.2@75.337,70.407
NetDD5_42: DD5.42 R67.2 | length 1.5
  Top Layer w0.2: DD5.42@70.648,74.135 70.649,74.137 70.649,75.604 R67.2@70.651,75.606
NetDD5_47: DD5.47 R131.1 | length 4.7
  Top Layer w0.25: R131.1@66.581,78.168 66.606,78.168 68.148,76.626 DD5.47@68.148,74.135
NetDD5_48: DD5.48 R132.1 | length 3.5
  Top Layer w0.25: R132.1@66.581,77.193 66.606,77.193 66.756,77.043 66.756,77.018 67.648,76.126 DD5.48@67.648,74.135
NetDD6_3: DD6.3 R84.2 VT3.1 | length 6.6
  Top Layer w0.2: VT3.1@59.662,56.338 59.662,55.757 59.997,55.422 59.997,54.41 R84.2@60.142,54.265 60.167,54.265 60.342,54.09 60.342,54.065 60.571,53.836 60.987,53.836 61.429,53.395 DD6.3@61.429,50.734
NetDD6_22: DD6.22 R103.1 | length 2.7
  Top Layer w0.2: R103.1@50.64,48.47 50.64,48.534 DD6.22@53.229,48.534
NetDD6_23: DD6.23 R104.2 | length 1.4
  Top Layer w0.2: DD6.23@53.229,48.034 53.232,48.031 54.009,48.031 v1(54.012,48.029)
  Bottom Layer w0.3: v1(54.012,48.029) 54.596,48.029 ccw(c54.596,48.053) R104.2@54.62,48.053
NetDD6_24: DD6.24 R107.1 | length 1.8
  Top Layer w0.2: R107.1@51.573,47.158 52.324,47.158 52.687,47.521 53.19,47.521 DD6.24@53.216,47.547
NetDD6_39: DD6.39 R96.2 | length 5.4
  Top Layer w0.3: R96.2@52.27,36.426 54.185,38.341 ccw(c52.389,40.137) 54.929,40.137 DD6.39@54.929,40.834
NetDD6_40: DD6.40 R95.2 | length 5.2
  Top Layer w0.3: R95.2@53.315,36.454 53.318,36.454 53.44,36.576 53.44,36.579 54.705,37.845 ccw(c52.957,39.593) 55.429,39.593 DD6.40@55.429,40.834
NetDD6_41: DD6.41 R94.2 | length 5
  Top Layer w0.3: R94.2@54.331,36.426 55.185,37.28 ccw(c53.389,39.076) 55.929,39.076 DD6.41@55.929,40.834
NetDD6_42: DD6.42 R93.2 | length 4.5
  Top Layer w0.3: R93.2@55.581,36.573 55.685,36.677 ccw(c53.889,38.473) 56.429,38.473 DD6.42@56.429,40.834
NetDD6_43: DD6.43 R92.2 | length 4.5
  Top Layer w0.3: R92.2@56.451,36.426 ccw(c55.296,37.581) 56.929,37.581 DD6.43@56.929,40.834
NetDD6_44: DD6.44 R91.2 | length 4.4
  Top Layer w0.3: R91.2@57.347,36.426 57.429,36.508 DD6.44@57.429,40.834
NetDD6_45: DD6.45 R30.1 | length 10.6
  Top Layer w0.2: DD6.45@57.929,40.834 57.965,40.87 57.965,42.53 v1(57.962,42.533) ; v1(65.273,41.763) 65.382,41.763 65.484,41.661 66.55,41.661 R30.1@66.554,41.665
  Bottom Layer w0.2: v1(57.962,42.533) 63.283,42.533 63.949,41.867 v1@65.273,41.867
NetDD6_47: DD6.47 R90.2 | length 4.5
  Top Layer w0.3: R90.2@58.595,36.426 ccw(c57.79,37.232) 58.929,37.232 DD6.47@58.929,40.834
NetDD6_48: DD6.48 R89.2 | length 4.4
  Top Layer w0.3: DD6.48@59.429,40.834 59.429,36.488 R89.2@59.491,36.426
NetDD6_49: DD6.49 R88.2 | length 4.5
  Top Layer w0.3: DD6.49@59.929,40.834 59.929,37.533 ccw(c61.495,37.533) R88.2@60.388,36.426
NetDD6_50: DD6.50 R87.2 | length 7.4
  Top Layer w0.25: 60.429,38.741 60.429,39.411
  Top Layer w0.3: DD6.50@60.429,40.834 60.429,39.411 60.429,38.534 ccw(c62.969,38.534) 62.969,35.994 R87.2@63.404,35.994
NetDD6_51: DD6.51 R86.2 | length 6.6
  Top Layer w0.3: DD6.51@60.929,40.834 60.929,38.517 ccw(c62.557,38.517) 62.557,36.889 R86.2@64.322,36.889
NetDD6_52: DD6.52 R85.2 | length 6.6
  Top Layer w0.3: DD6.52@61.429,40.834 61.429,38.721 ccw(c62.365,38.721) 62.365,37.785 R85.2@65.422,37.785
NetDD7_3: DD7.3 R110.1 | length 1.7
  Top Layer w0.2: R110.1@45.289,37.822 45.289,39.26 cw(c45.576,39.26) DD7.3@45.373,39.463
NetDD7_7: DD7.7 R109.1 | length 3.9
  Top Layer w0.2: R109.1@41.176,44.707 41.176,44.682 41.97,43.888 43.429,43.888 44.103,44.562 DD7.7@44.103,44.943
NetK1_8: K1.8 VD1.AN VT1.3 | length 6.2
  Top Layer w0.3: K1.8@32.554,59.064 32.693,58.925 VD1.AN@32.693,55.712 ; VD1.AN@32.693,55.642 32.693,54.752 32.91,54.535 VT1.3@34.487,54.535
NetR8A_2: R8A.2 R8B.2 R8C.2 R30.2 R83.2 VT4.3 | length 34.8
  Top Layer w0.2: R30.2@67.404,41.576 67.406,41.578 68.519,41.578 68.521,41.576 68.525,41.58 69.53,41.58 69.534,41.576 69.538,41.58 70.547,41.58 70.551,41.576 71.1,41.576 71.509,41.167 VT4.3@74.257,41.167 74.257,40.469 74.374,40.351 79.785,40.351 80.417,40.983 80.417,55.065 78.7,56.781 78.7,59.214 77.545,60.369 R83.2@77.545,60.394
NetR20_2: R20.2 VT1.1 | length 1.4
  Top Layer w0.2: VT1.1@36.687,53.585 36.689,53.587 38.084,53.587 R20.2@38.087,53.59
NetR36_2: R36.2 U1.5 | length 1.9
  Top Layer w0.2: R36.2@19.392,10.459 19.399,10.502 19.399,12.052 U1.5@19.674,12.052
NetR38_2: R38.2 U2.5 | length 1.9
  Top Layer w0.2: R38.2@19.392,18.315 19.399,18.358 19.399,19.908 U2.5@19.674,19.908
NetR44_2: R44.2 U3.5 | length 2
  Top Layer w0.2: R44.2@19.111,2.345 19.335,2.569 U3.5@19.335,4.283
NetR46_2: R46.2 U4.5 | length 1.9
  Top Layer w0.2: R46.2@19.393,51.725 19.401,51.768 19.401,53.318 U4.5@19.676,53.318
NetR48_1: R48.1 U5.6 | length 2.1
  Top Layer w0.2: R48.1@5.462,9.987 5.462,10.062 6.699,11.299 U5.6@6.699,11.526
NetR61_1: R61.1 R63.1 | length 1
  Top Layer w0.3: R63.1@45.394,61.208 45.394,61.215 R61.1@46.39,61.215
NetR127_2: R127.2 VT4.1 | length 3.8
  Top Layer w0.2: VT4.1@72.057,42.117 72.207,42.117 72.407,41.917 72.407,41.873 72.524,41.756 74.906,41.756 75.427,41.235 R127.2@75.452,41.235
NetR145_1: R145.1 XP9.1 | length 1.9
  Top Layer w0.4: XP9.1@4.111,80.246 R145.1@6.019,80.246
NetR148_1: R148.1 X1.4 | length 4.4
  Top Layer w0.6: v1(10.03,84.371) 10.03,85.211 R148.1@10.034,85.215
  Bottom Layer w0.6: v1(10.03,84.371) 10.03,85.058 11.626,86.654 X1.4@11.626,87.254
NetR150_1: R150.1 X3.3 | length 2.2
  Top Layer w0.4: X3.3@7.9,94.6 7.987,94.687 9.947,94.687 R150.1@10.034,94.774
NetR151_1: R151.1 X1.3 | length 3.9
  Top Layer w0.6: v1(10.03,80.081) 10.03,80.795 R151.1@10.034,80.799
  Bottom Layer w0.6: X1.3@7.301,79.254 7.301,79.396 7.985,80.081 v1(10.03,80.081)
NetR152_1: R152.1 X3.2 | length 9.8
  Top Layer w0.4: X3.2@7.9,91.3 8.075,91.125 9.859,91.125 R152.1@10.034,90.95
  Bottom Layer w0.4: X3.2@2.1,91.3 2.1,90.9 3.295,89.705 6.605,89.705 7.9,91 X3.2@7.9,91.3
NetR155_1: R155.1 XP13.1 | length 2.1
  Top Layer w0.4: XP13.1@4.218,84.847 4.218,84.869 4.461,85.112 5.611,85.112 5.911,84.812 R155.1@5.911,84.665
RIGHT: C183.1 R148.2 R152.2 R153.1 R155.2 | length 23.6
  Top Layer w0.4: R155.2@7.711,84.665 R153.1@7.711,86.865 ; 9.545,88.845 8.04,87.34 8.011,87.34 7.711,87.04 R153.1@7.711,86.865 ; R152.2@9.824,89.32 R152.2@10.02,89.32 ; R148.2@10.034,87.015 9.779,86.76 7.816,86.76 R153.1@7.711,86.865 ; C183.1@12.464,96.492 12.426,96.53 6.991,96.53 6.347,95.885 6.347,89.263 7.47,88.14 7.47,87.107 R153.1@7.711,86.865
RIGHT_C: R171.2 R172.2 XP14.3 | length 4.1
  Top Layer w0.3: XP14.3@79.934,91.128 R171.2@79.933,95.208
RIGHT_H: R173.1 R174.2 XP14.1 | length 4.1
  Top Layer w0.3: R174.2@74.806,95.209 74.806,91.176 XP14.1@74.854,91.128
RIGHT_P: C152.2 DA6.5 R115.2 XP6.1 | length 7.7
  Top Layer w0.2: XP6.1@4.111,65.251 4.264,65.098 8.212,65.098 8.418,65.304 8.443,65.304 8.618,65.479 R115.2@8.618,65.504 ; R115.2@8.618,65.536 9.668,65.536 10.931,65.536 11.127,65.732 DA6.5@11.127,66.046
SCL: DD1A.8 DD1B.8 DD1C.8 DD4.6 DD5.33 DD6.31 R105.2 XP2.2 | length 162.3
  Top Layer w0.2: 39.854,26.351 DD1C.8@39.98,25.019 39.998,25 v1@39.998,22.696 ; 39.854,26.351 39.854,33.736 cw(c42.346,33.736) 42.346,36.229 47.571,36.229 ccw(c47.571,38.769) 50.111,38.769 50.111,43.358 cw(c50.311,43.357) 50.111,43.37 cw(c50.824,43.32) 50.824,44.034 DD6.31@53.229,44.034 ; v1(62.146,22.686) 62.199,22.739 62.199,24.857 DD1B.8@62.219,24.877 ; DD5.33@73.833,71.951 74.619,71.951 ccw(c74.619,72.288) 74.858,72.049 cw(c75.096,71.811) 75.096,72.148 78.461,72.148 cw(c78.461,70.265) 80.344,70.265 80.344,62.083 ccw(c81.455,62.083) DD4.6@81.455,60.973 81.912,60.973 cw(c81.912,59.754) v1@82.773,60.616 ; DD1A.8@84.356,25.019 84.356,24.569 84.401,24.191 84.401,23.711 84.356,23.585 84.356,22.695 v1(84.365,22.686)
  Bottom Layer w0.2: v1(39.989,22.686) 41.129,22.686 ccw(c41.129,25.062) 42.809,23.382 42.979,23.552 cw(c44.37,22.161) 43.458,23.904 cw(c44.37,22.161) 44.37,24.129 45.226,24.129 59.293,24.129 59.889,24.129 cw(c59.889,22.483) 61.052,23.647 61.673,23.026 v1@61.933,22.831 ; v1(62.146,22.686) v1@61.933,22.831 ; 63.319,22.686 62.494,22.686 cw(c62.494,23.848) v1@61.933,22.831 ; 63.32,22.686 ccw(c63.32,24.981) 64.943,23.359 65.138,23.553 cw(c66.529,22.162) 65.572,23.881 cw(c66.529,22.162) 66.529,24.129 82.077,24.129 cw(c82.077,22.388) 83.308,23.619 83.941,22.986 ccw(c84.665,23.71) 84.665,22.686 ; v1(82.772,60.538) 83.012,60.306 83.229,60.089 cw(c82.165,59.026) 83.669,59.026 83.669,34.808 ccw(c85.829,34.808) 84.303,33.279 84.782,32.8 85.658,31.925 86.151,31.431 88.573,29.009 cw(c86.777,27.213) 88.728,28.839 cw(c87.308,27.418) 89.317,27.418 89.317,26.26 cw(c86.777,26.26) 88.573,24.464 87.539,23.43 cw(c85.743,25.226) 85.743,22.686 84.665,22.686 ; v1@82.872,60.652 cw(c82.872,61.054) 82.47,61.054 82.47,63.789 cw(c83.653,63.789) 83.653,64.972 86.324,64.972 ccw(c86.324,67.512) 88.12,65.716 88.68,66.276 cw(c90.127,64.829) 90.127,66.875 91.325,66.875 cw(c91.325,65.218) 92.981,65.218 XP2.2@92.981,65.14 ; v1(84.365,22.686) 84.665,22.686